# Altium PCB MPU6050_PCB.PcbDoc
Units mm, origin at the board's own origin, x right, y up, seen from the top; angles counter-clockwise.
Board outline 32 x 30 mm, 2 copper layers (L1, L2), stack 1.671 mm thick; 17 components, 12 nets, 62 pads, 2 vias.
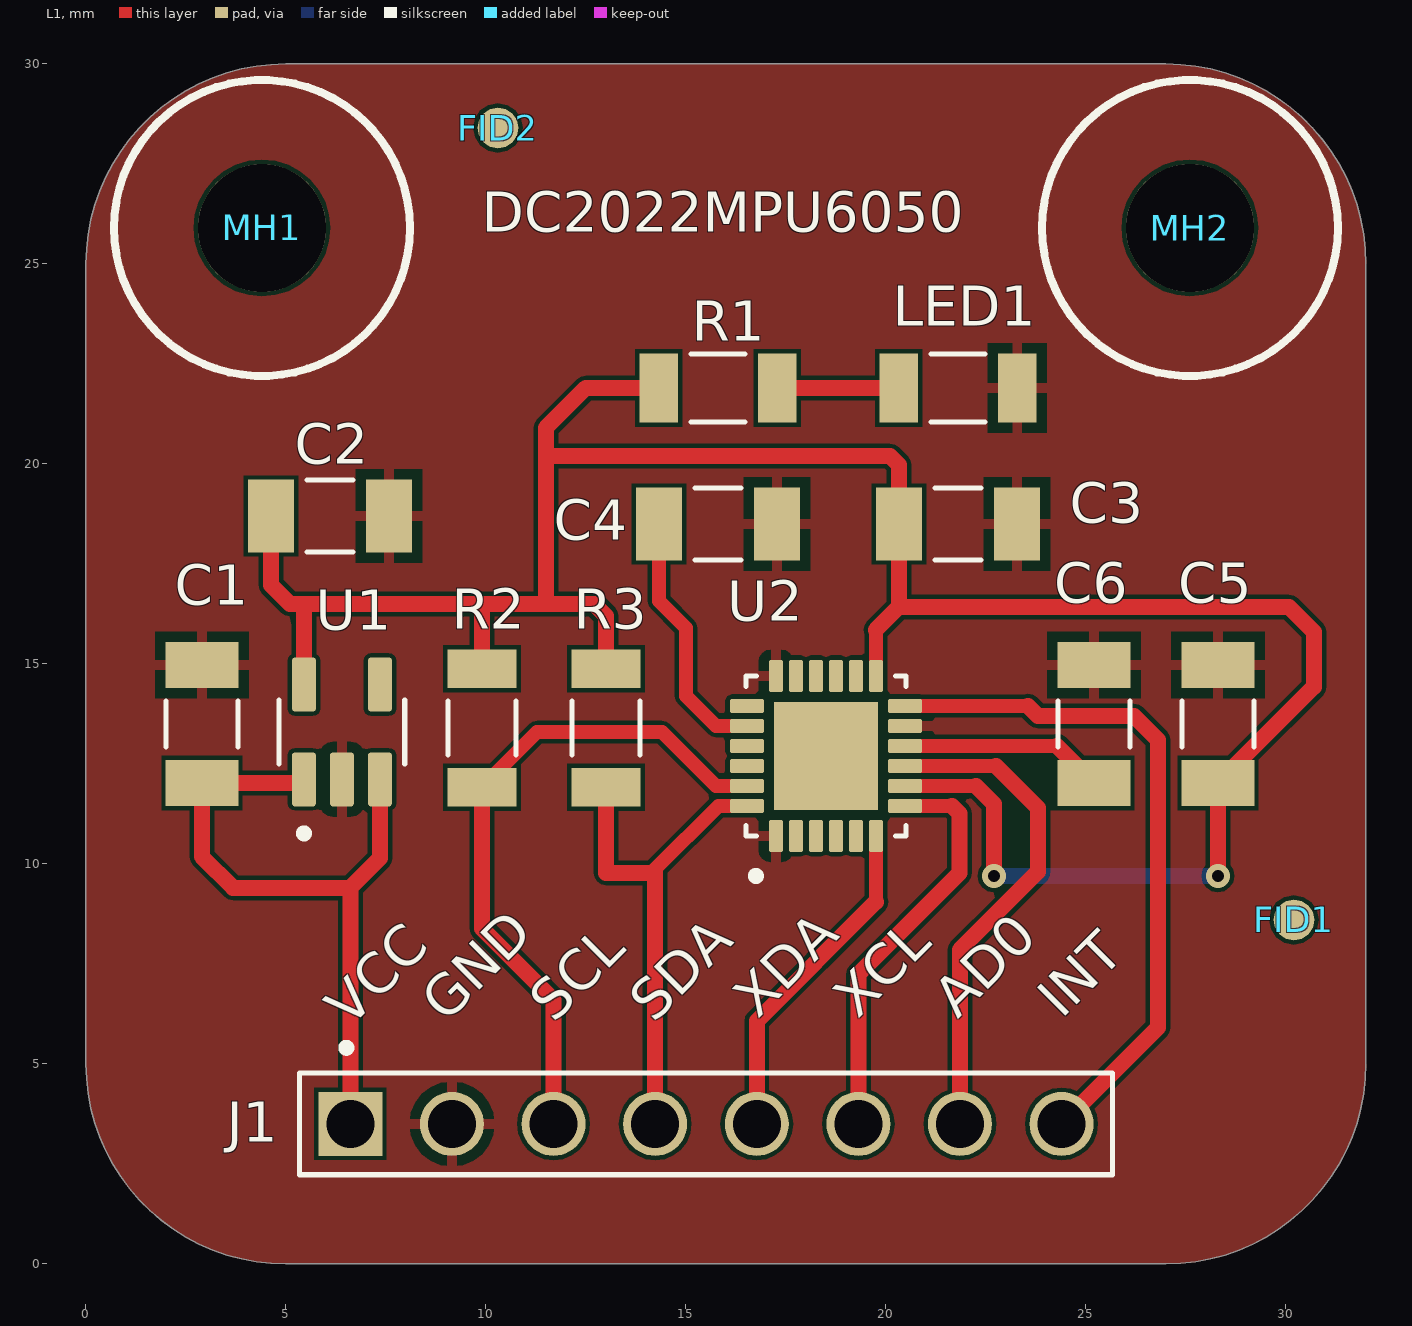
[diagram p0: L1 view]
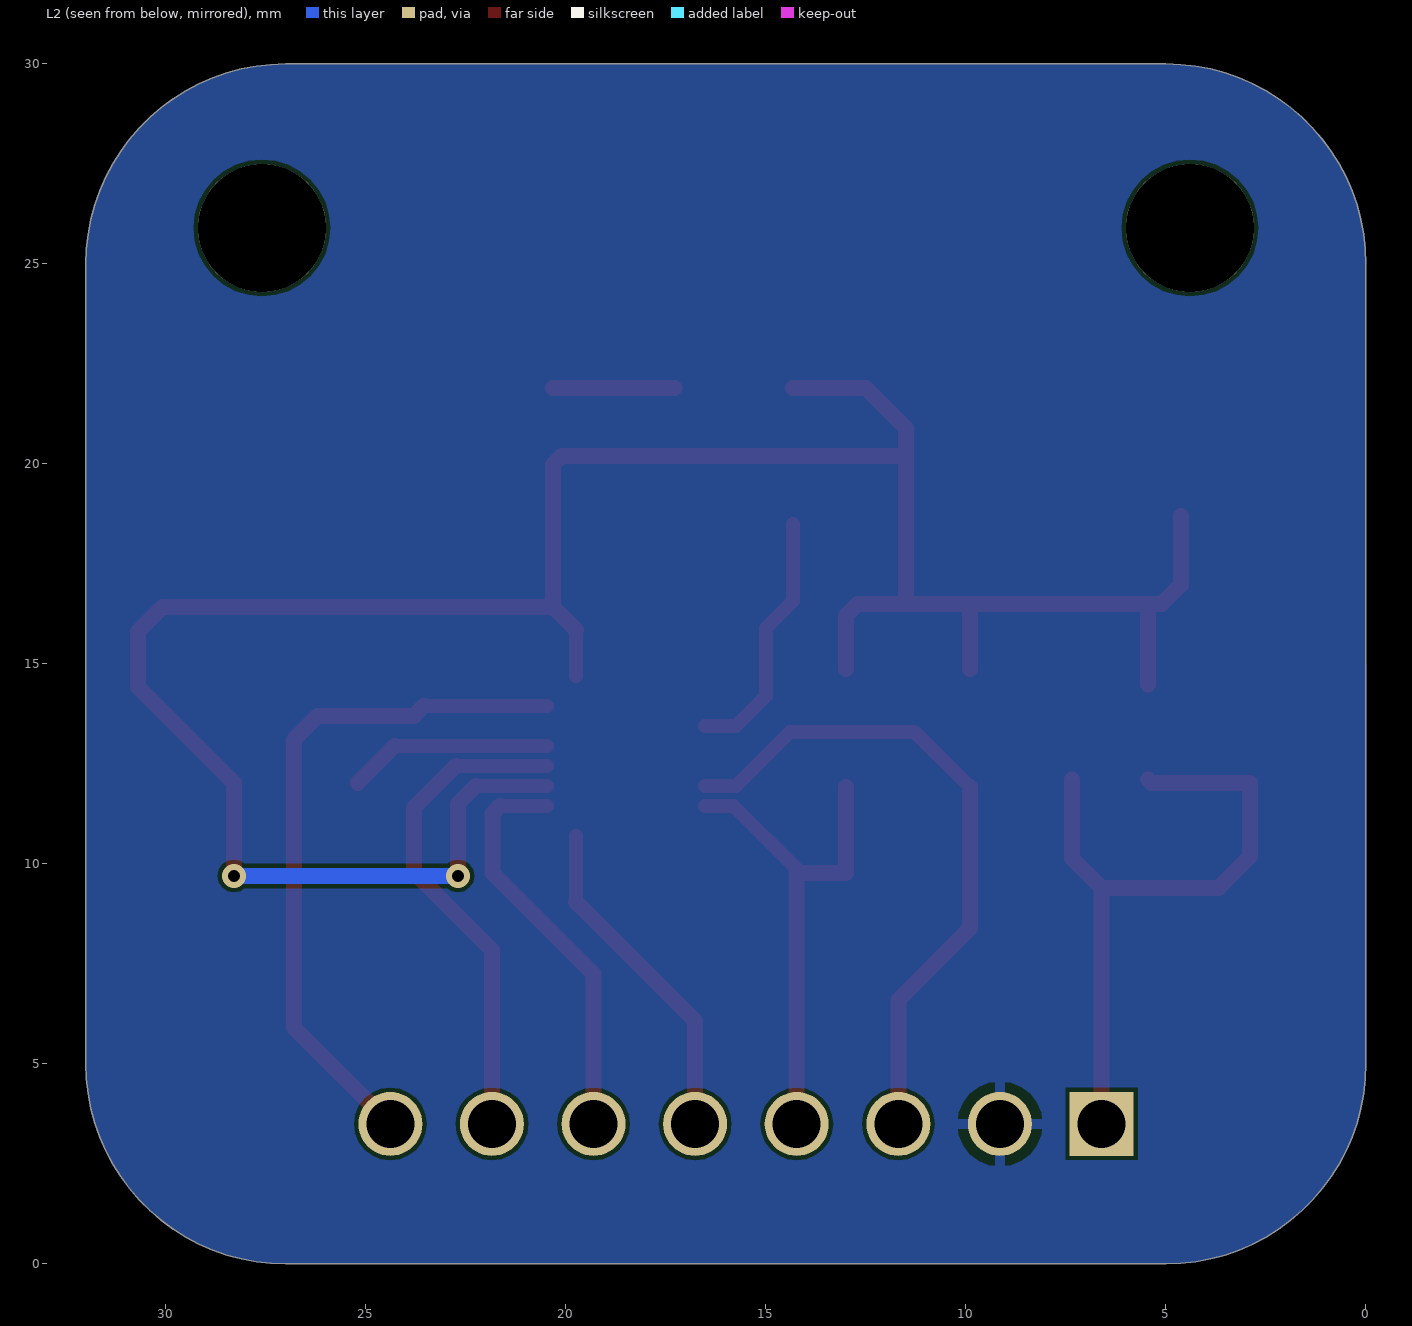
[diagram p1: L2 view, seen from below]
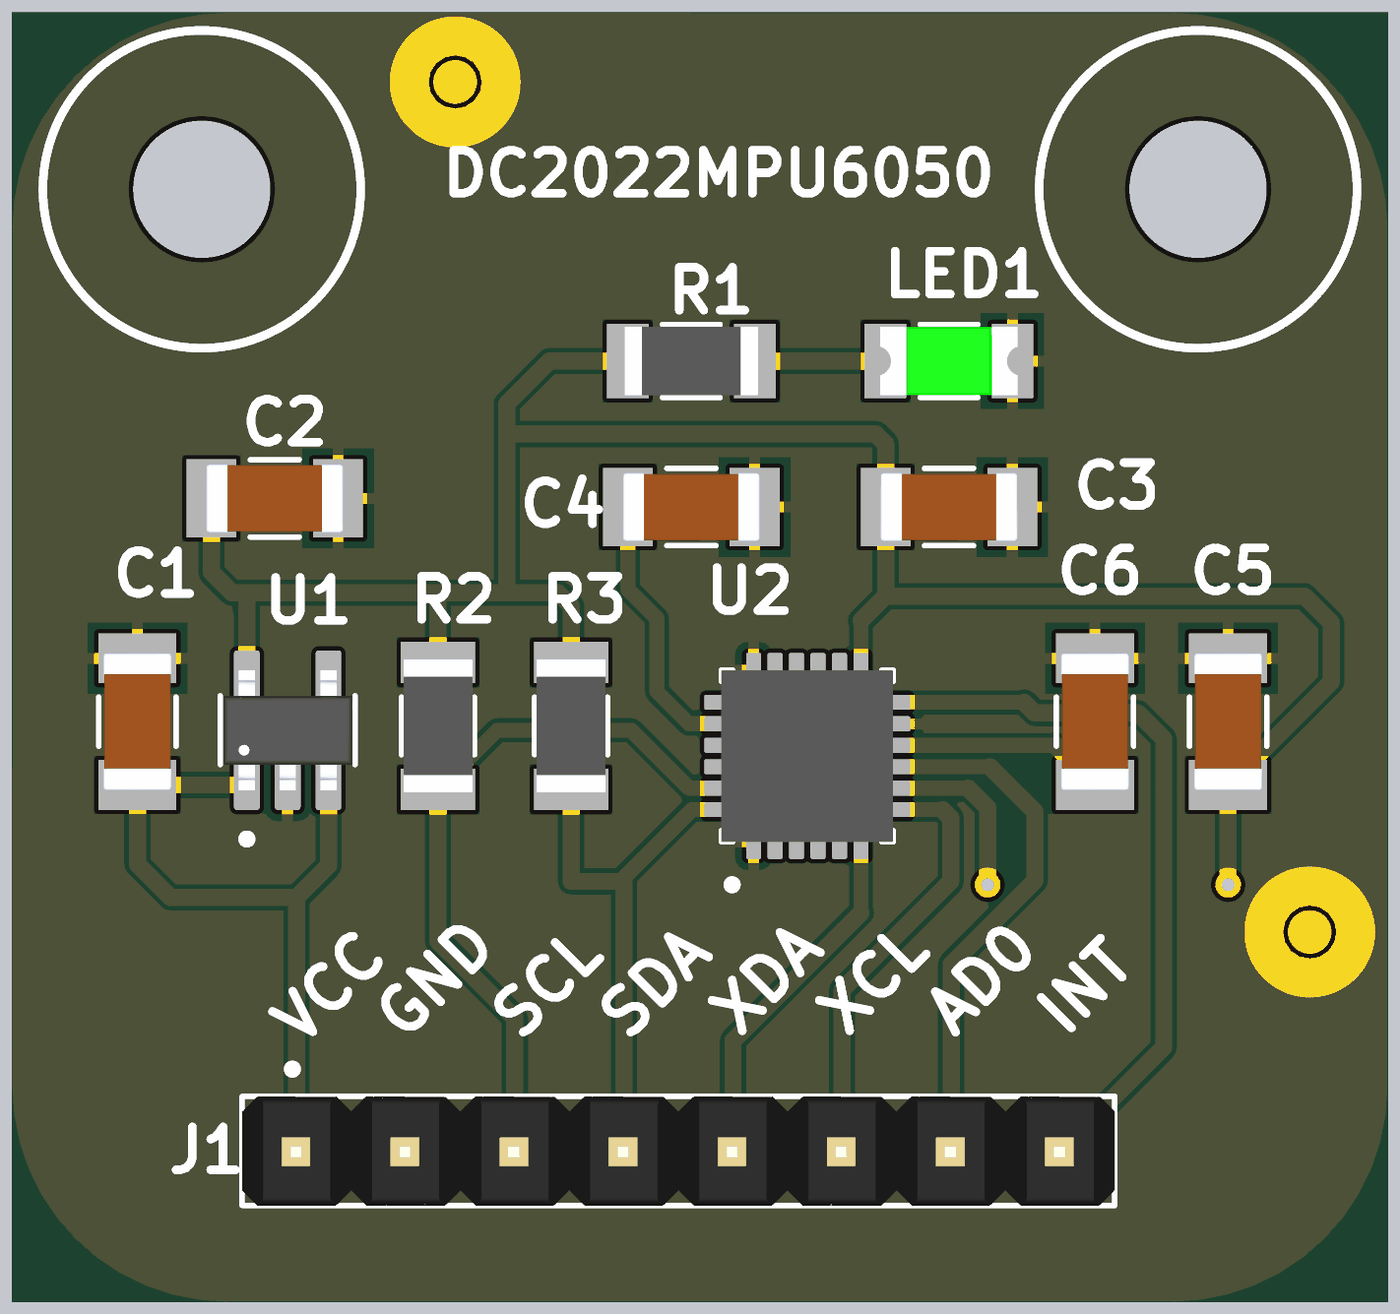
[diagram p2: 3D render of the assembled board from above, using the file's embedded part models]

## Layer stack, top to bottom
L1: signal copper 0.0356
Dielectric: core 1.6, FR-4, Dk 4.8
L2: signal copper 0.0356

## Board outline
0,5 ccw(c5,5) 5,0 27,0 ccw(c27,5) 32,5 32,25 ccw(c27,25) 27,30 5,30 ccw(c5,25) 0,25

## Design rules (kind name [scope] priority, off if disabled: settings)
AssemblyTestPointUsage [All] p1: valid=2
Clearance [All] p1: gap=0.1
ComponentClearance [All] p1: gap=0.2 collisioncheckmode=3 verticalgap=0.2 showdistances=FALSE
FabricationTestPointUsage [All] p1: valid=2 allowmultiple=FALSE
HoleSize [All] p1: absolutevalues=TRUE maxlimit=10 minlimit=0.2 maxpercent=80.000 minpercent=20.000
HoleToHoleClearance [All] p1: gap=0.3 allowstackedmicrovias=TRUE
MinimumSolderMaskSliver [All] p1: minsoldermaskwidth=0.05
PolygonConnect [All] p1: connectstyle=Relief reliefconductorwidth=0.254 reliefentries=4 polygonreliefangle="90 Angle" airgapwidth=0.254
RoutingVias [All] p1: holewidth=0.3 width=0.6 viastyle="Through Hole" minholewidth=0.3 minwidth=0.6 maxholewidth=0.3 maxwidth=0.6
SilkToSilkClearance [All] p1: silktosilkclearance=0.1
SilkToSolderMaskClearance [IsPad] p1: minsilkscreentomaskgap=0.1 clearancetoexposedcopper=TRUE
SolderMaskExpansion [All] p1: expansion=0.1
Width [All] p1: maxlimit=0.4 minlimit=0.3 preferedwidth=0.4
Width Power [InNet('5V') or InNet('GND') or InNet('3.3V')] p2: maxlimit=4 minlimit=0.3 preferedwidth=0.4
20 further rules are at their usual default settings.

## Components (designator, comment, footprint, x,y, rotation, side; value= is the part's Value field where it differs from the comment)
C1 "C 1uF 16V" "CAP CER 1UF 10V X7R 1206" 2.9,13.5 r90 top
C2 "C 1uF 16V" "CAP CER 1UF 10V X7R 1206" 6.1,18.7 r0 top
C3 "C 0.1uF 10V" "CAP CER 0.1UF 10V X7R 1206" 21.8,18.5 r0 top
C4 "C 2200pf 50V" "CAP CER 2200PF 50V NP0 1206" 15.8,18.5 r0 top
C5 "C 10nF 10V" "CAP CER 1206 10NF 10V ULTRA STAB" 28.3,13.5 r90 top
C6 "C 0.1uF 10V" "CAP CER 0.1UF 10V X7R 1206" 25.2,13.5 r90 top
FID1 "FID_1mm" FID_40_120 30.2,8.6 r0 top
FID2 "FID_1mm" FID_40_120 10.3,28.4 r90 top
J1 "8 PIN HEADER" "CONN HEADER VERT 8POS 3.96MM" 15.5,3.5 r0 top
LED1 "RED LED 1206" "RED LED 1206" 21.8,21.9 r0 top
MH1 "MH_3.2mmD" "MH 7.4MMD 3.2MMDIRLL NO PLATED" 4.4,25.9 r0 top
MH2 "MH_3.2mmD" "MH 7.4MMD 3.2MMDIRLL NO PLATED" 27.6,25.9 r0 top
R1 "1K 5% 1/4W 1206" "RES SMD 1K OHM 5% 1/4W 1206" 15.8,21.9 r0 top
R2 "4.7K 5% 1/4W 1206" "RES SMD 4.7K OHM 5% 1/4W 1206" 9.9,13.4 r270 top
R3 "4.7K 5% 1/4W 1206" "RES SMD 4.7K OHM 5% 1/4W 1206" 13,13.4 r270 top
U1 "AP7343-33W5-7" AP7343-33W5-7 6.4,13.3 r90 top
U2 "MPU-6050" MPU6050 18.5,12.7 r90 top

## Footprints (in the part's own frame and the unit in brackets; to place one, negate y for a bottom-side part, rotate by r counter-clockwise, add the part's x,y. Pads: shape width x height; smd on the part's side, far side on the other; paste and mask are expansions set on the pad)
AP7343-33W5-7 [mm] "SOT25"
  rrect25% 1.35x0.6 smd: 1(-1.185,0.95) 2(-1.185,0) 3(-1.185,-0.95) 4(1.185,-0.95) 5(1.185,0.95)
  silkscreen extent -2.63,-1.57 0.8,1.57, body extent -1.4,-1.5 1.4,1.5, height 1.4
"CAP CER 0.1UF 10V X7R 1206" [mm]
  rect 1.16x1.82 smd: 1(-1.475,0) 2(1.475,0)
  silkscreen extent -0.57,-0.9 0.57,0.9, body extent -1.6,-0.8 1.6,0.8, height 1.4
"CAP CER 1UF 10V X7R 1206" [mm]
  rect 1.16x1.82 smd: 1(-1.475,0) 2(1.475,0)
  silkscreen extent -0.57,-0.9 0.57,0.9, body extent -1.6,-0.8 1.6,0.8, height 1.4
"CAP CER 1206 10NF 10V ULTRA STAB" [mm]
  rect 1.16x1.82 smd: 1(-1.475,0) 2(1.475,0)
  silkscreen extent -0.57,-0.9 0.57,0.9, body extent -1.6,-0.8 1.6,0.8, height 1.4
"CAP CER 2200PF 50V NP0 1206" [mm]
  rect 1.16x1.82 smd: 1(-1.475,0) 2(1.475,0)
  silkscreen extent -0.57,-0.9 0.57,0.9, body extent -1.6,-0.8 1.6,0.8, height 1.4
"CONN HEADER VERT 8POS 3.96MM" [mm]
  rect 1.6x1.6 hole 1.2: 1(-8.89,0)
  round 1.6 hole 1.2: 2(-6.35,0) 3(-3.81,0) 4(-1.27,0) 5(1.27,0) 6(3.81,0) 7(6.35,0) 8(8.89,0)
  silkscreen extent -10.16,-1.27 10.16,2, body extent -10.16,-1.27 10.16,1.27, height 9.2
FID_40_120 [mil]
  round 40 smd paste-40 mask+40: 1(0,0)
"MH 7.4MMD 3.2MMDIRLL NO PLATED" [mm]
  round 3.2 hole 3.2 unplated: 1(0,0)
  silkscreen extent -3.7,-3.7 3.7,3.7
MPU6050 [mm] "24 Lead QFN (4x4x0.9) mm NiPdAu Lead-frame finish"
  rrect25% 0.8x0.35 smd: 1(-2,1.25) 2(-2,0.75) 3(-2,0.25) 4(-2,-0.25) 5(-2,-0.75) 6(-2,-1.25) 13(2,-1.25) 14(2,-0.75) 15(2,-0.25) 16(2,0.25) 17(2,0.75) 18(2,1.25)
  rrect25% 0.35x0.85 smd: 7(-1.25,-1.975) 8(-0.75,-1.975) 9(-0.25,-1.975) 10(0.25,-1.975) 11(0.75,-1.975) 12(1.25,-1.975) 19(1.25,1.975) 20(0.75,1.975) 21(0.25,1.975) 22(-0.25,1.975) 23(-0.75,1.975) 24(-1.25,1.975)
  rect 2.7x2.6 smd paste-2: 25(0,0)
  silkscreen extent -3.1,-2 2,2, body extent -2,-2 2,2, height 0.93
"RED LED 1206" [mm]
  rect 0.97x1.73 smd: 1(-1.48,0) 2(1.48,0)
  silkscreen extent -0.67,-0.85 0.67,0.85, body extent -1.6,-0.8 1.6,0.8, height 1.1
"RES SMD 1K OHM 5% 1/4W 1206" [mm]
  rect 0.97x1.73 smd: 1(-1.48,0) 2(1.48,0)
  silkscreen extent -0.67,-0.85 0.67,0.85, body extent -1.55,-0.8 1.55,0.8, height 0.65
"RES SMD 4.7K OHM 5% 1/4W 1206" [mm]
  rect 0.97x1.73 smd: 1(-1.48,0) 2(1.48,0)
  silkscreen extent -0.67,-0.85 0.67,0.85, body extent -1.55,-0.8 1.55,0.8, height 0.65

## Part data
C1 C2: library part "CAP CER 1UF 10V X7R 1206", "1 µF ±10% 10V Capacitores cerámicos X7R 1206 (3216 métrico)"
C3 C6: library part "CAP CER 0.1UF 10V X7R 1206", "0.1 µF ±10% 10V Capacitores cerámicos X7R 1206 (3216 métrico)"
C4: library part "CAP CER 2200PF 50V NP0 1206", "CAP CER 2200PF 50V NP0 1206"
C5: library part "CAP CER 1206 10NF 10V ULTRA STAB", "10000 pF ±1% 10V Capacitores cerámicos X8R 1206 (3216 métrico)"
FID1 FID2: "Fiducial 40mil Diameter, 120mil Mask"
J1: library part "CONN HEADER VERT 8POS 3.96MM", "Cabezal de conector Orificio pasante 8 posiciones 0.156\" (3.96mm)"
LED1: library part "LED 1206 FLAT LENS RED", "Rojo 630nm Indicación led: discreta 1.5V 1206 (3216 métrico)"
MH1 MH2: "MH 7..4mmD 3.2mmDrill Non plated"
R1: library part "RES SMD 1K OHM 5% 1/4W 1206", "1 kOhms ±5% 0.25W, 1/4W Resistencia en microprocesador 1206 (3216 métrico) - Película gruesa"
R2 R3: library part "RES 4.7K OHM 5% 1/4W 1206", "4.7 kOhms ±5% 0.25W, 1/4W Resistencia en microprocesador 1206 (3216 métrico) Resistente a la humedad Película gruesa"
U1: "Low dropout regulator with high output voltage. 3.3V 300mA"
U2: "Acelerometer, gyro, 6 axis"

## Via types
v1: diameter 0.6, hole 0.3, L1 to L2, 2 vias

## Nets (pads, with @x,y where several pads share a name; then routed paths per layer and width w, separated by ;. In a path a pad name is that pad's centre, name@x,y a point inside that pad or via, vN(x,y) a via of type N, cw(c..) or ccw(c..) an arc to the next point about the centre after c; other vN are vias at no path point)
AD0: J1.7 U2.9 | length 12.5
  L1 w0.35: U2.9 22.75,12.45
  L1 w0.4: J1.7 21.85,7.85 23.8,9.8 23.8,11.4 22.75,12.45
GND: C1.2 C2.2 C3.2 C4.2 C5.2 C6.2 J1.2 LED1.2 U1.2 U2.1 U2.11 U2.18
INT: J1.8 U2.12 | length 17.3
  L1 w0.35: U2.12 23.55,13.95
  L1 w0.4: 23.55,13.95 23.8,13.7 26.2,13.7 26.8,13.1 26.8,5.91 J1.8
NetC4_1: C4.1 U2.20 | length 6.4
  L1 w0.35: C4.1 14.325,16.575 15,15.9 15,14.2 15.75,13.45 U2.20
NetC6_1: C6.1 U2.10 | length 5.1
  L1 w0.35: U2.10 24.275,12.95
  L1 w0.4: 24.275,12.95 C6.1
NetLED1_1: LED1.1 R1.2 | length 3
  L1 w0.4: R1.2 LED1.1
SCL: J1.3 R2.2 U2.23 | length 16.9
  L1 w0.35: R2.2 11.28,13.3 14.4,13.3 15.75,11.95 U2.23
  L1 w0.4: R2.2 9.9,8.388 11.69,6.598 J1.3
SDA: J1.4 R3.2 U2.24 | length 12.6
  L1 w0.35: 14.23,9.87 15.81,11.45 U2.24
  L1 w0.4: R3.2 13,9.779 14.23,9.779 J1.4
"VCC 3.3V": C2.1 C3.1 C5.1 R1.1 R2.1 R3.1 U1.5 U2.8 U2.13 | length 65
  L1 w0.35: U2.13 19.75,15.85 ; U2.8 22.25,11.95
  L1 w0.4: C2.1 4.625,16.975 5.1,16.5 5.45,16.5 ; U1.5 5.45,16.5 ; R2.1 9.9,16.5 ; 11.5,20.2 20.1,20.2 20.325,19.975 C3.1 20.325,16.425 ; R3.1 13,16.2 12.7,16.5 11.5,16.5 ; R1.1 12.5,21.9 11.5,20.9 11.5,16.5 ; 19.75,15.85 20.325,16.425 ; 22.25,11.95 22.7,11.5 v1(22.7,9.7) ; v1(28.3,9.7) C5.1 30.7,14.425 30.7,15.8 30.075,16.425 20.325,16.425 ; 5.45,16.5 9.9,16.5 ; 9.9,16.5 11.5,16.5
  L2 w0.4: v1(22.7,9.7) v1(28.3,9.7)
"VCC 5V": C1.1 J1.1 U1.1 U1.3 | length 17.4
  L1 w0.4: U1.1 5.36,12.025 C1.1 2.9,10.181 3.677,9.404 6.61,9.404 ; J1.1 6.61,9.404 ; U1.3 7.35,10.144 6.61,9.404
XCL: J1.6 U2.7 | length 10.3
  L1 w0.35: U2.7 21.65,11.45
  L1 w0.4: J1.6 19.31,7.245 21.84,9.775 21.84,11.26 21.65,11.45
XDA: J1.5 U2.6 | length 8.4
  L1 w0.35: 19.75,9.05 U2.6
  L1 w0.4: J1.5 16.77,6.07 19.75,9.05
pads on no net: FID1.1 FID2.1 MH1.1 MH2.1 U1.4 U2.2 U2.3 U2.4 U2.5 U2.14 U2.15 U2.16 U2.17 U2.19 U2.21 U2.22 U2.25

## Polygon pours and split planes (outlines as drawn)
GND on L1 "L1-GND" (solid, remove dead copper, pour order 20): 0,5 ccw(c5,5) 5,0 27,0 ccw(c27,5) 32,5 32,25 ccw(c27,25) 27,30 5,30 ccw(c5,25) 0,25
GND on L2 "L2-GND" (solid, remove dead copper, pour order 22): 0,5 ccw(c5,5) 5,0 27,0 ccw(c27,5) 32,5 32,25 ccw(c27,25) 27,30 5,30 ccw(c5,25) 0,25

## Silkscreen, mask and mechanical layers (free items; w line width, h text height)
Top Overlay:
  text "DC2022MPU6050" at 9.9,25.8 h1
  text "XDA" at 16.8,6.1 h1 r45
  text "XCL" at 19.3,6.1 h1 r45
  text "AD0" at 21.8,6.1 h1 r45
  text "INT" at 24.4,6.1 h1 r45
  text "GND" at 9,6 h1 r45
  text "SCL" at 11.7,6 h1 r45
  text "SDA" at 14.2,6 h1 r45
  text "VCC" at 6.6,5.875 h1 r45
Mechanical DWG:
  circle w1.016: c4.4,25.9 r1.6
  circle w1.016: c27.5,26 r1.6
  lines w1.016: 27,30 cw(c27,25) 32,25 ; 27.1,30 5,30 ccw(c5,25) 0,25 0,5 ccw(c5,5) 5,0 27,0 ccw(c27,5) 32,5 32,24.9
  text "Mechanical Drawing" at -12.6,45.1 h3.5
  text "of MPU6050" at -7.4,40.1 h3.5
  text ".VersionRevision" at 29.9,40.1 h3.5
  text "Units: mm" at -10.2,-10.2 h2.03
  text "Scale: 1:1" at -10.3,-13.7 h2.03
Manuf. Notes:
  text "Board info" at 45,29 h1
  text "FILES" at -41,28 h1
  text "Minimum Through Hole Via: 0.6mm(pad)/0.3(drill). Drilling: L1-L2" at 45,27 h1
  text "*.GTO - Top Overlay" at -41,26 h1
  text "1. Finished panel thikness not critical: 1.6mm" at 45,25 h1
  text "*.GTP - Top Paste" at -41,24 h1
  text "2. Board finish: HASL" at 45,23 h1
  text "*.GTS - Top Solder" at -41,22 h1
  text "3. Solder resist: Apply to both sides colour - Blue" at 45,21 h1
  text "*.GTL - L1 (Positive)" at -41,20 h1
  text "4. Component ident: Colour white" at 45,19 h1
  text "*.GBL - L2 (Positive)" at -41,18 h1
  text "*.GBS - Bottom Solder" at -41,16 h1
  text "*.GBO - Bottom Overlay" at -41,14 h1
  text "*.GM2 - Mechanical Drawing" at -41,12 h1
  text "*.GM3 - Manufacturing Notes" at -41,10 h1
  text "*.GM28 - Board Outline" at -41,8 h1
  text "MPU 6050" at 45,5 h1
  text ".versionRevision" at 56,5 h1
  text "Designed by Damian Caputo" at 45,3 h1
  text "Contact: damian.m.caputo@gmail.com" at 45,1 h1
Board Outline:
  lines w0.254: 27,30 cw(c27,25) 32,25 ; 27.1,30 5,30 ccw(c5,25) 0,25 0,5 ccw(c5,5) 5,0 27,0 ccw(c27,5) 32,5 32,24.9
ASMTOP:
  the board outline again, w0.254
  text "Assembly TOP MPU6050" at -0.8,34.6 h1.5
  text ".versionRevision" at 30.7,34.575 h1.5
  text ".variantName" at 6.4,31.975 h1.5

## Dimensions
5,30 to 5,0 on Mechanical DWG
0,5 to 32,5 on Mechanical DWG
4.4,25.9 to 0,25 on Mechanical DWG
27.6,25.9 to 32,25 on Mechanical DWG
27.6,25.9 to 27,30 on Mechanical DWG
4.4,25.9 to 5,30 on Mechanical DWG
5,5 to 4.3,4.4 on Mechanical DWG